# Altium PCB PCB.PcbDoc
Units mm, origin at the board's own origin, x right, y up, seen from the top; angles counter-clockwise.
Board outline 40 x 20 mm, 6 copper layers (Top Layer, Layer 1, Layer 2, Layer 3, Layer 4, Bottom Layer), stack 1.549 mm thick; 12 components, 8 nets, 42 pads, 136 vias.
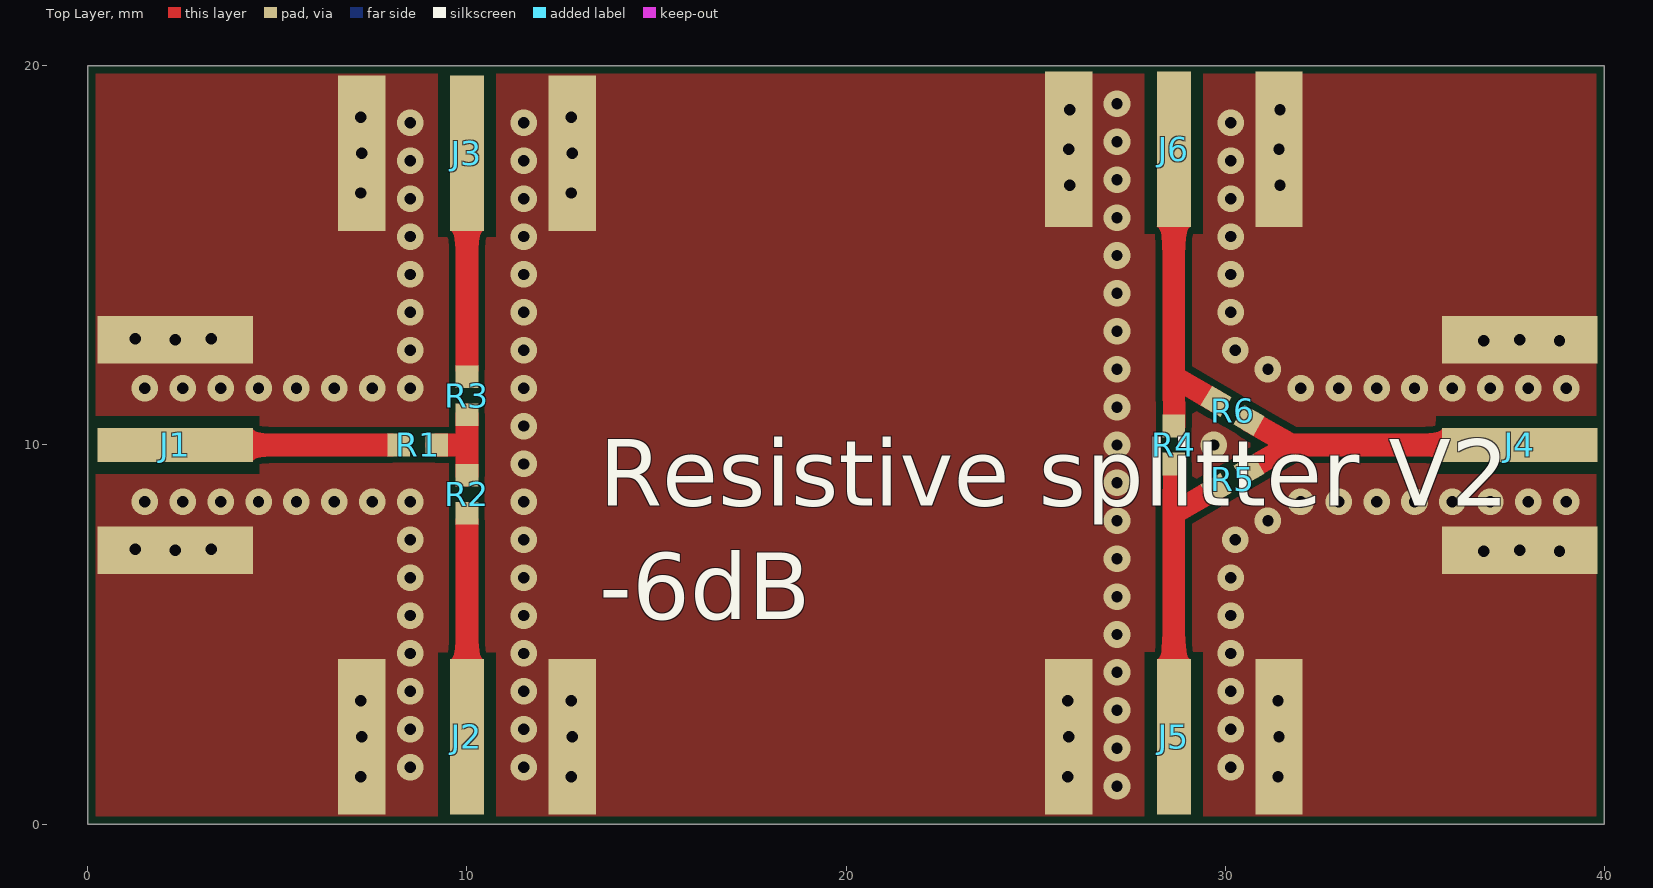
[diagram p0: Top Layer view]
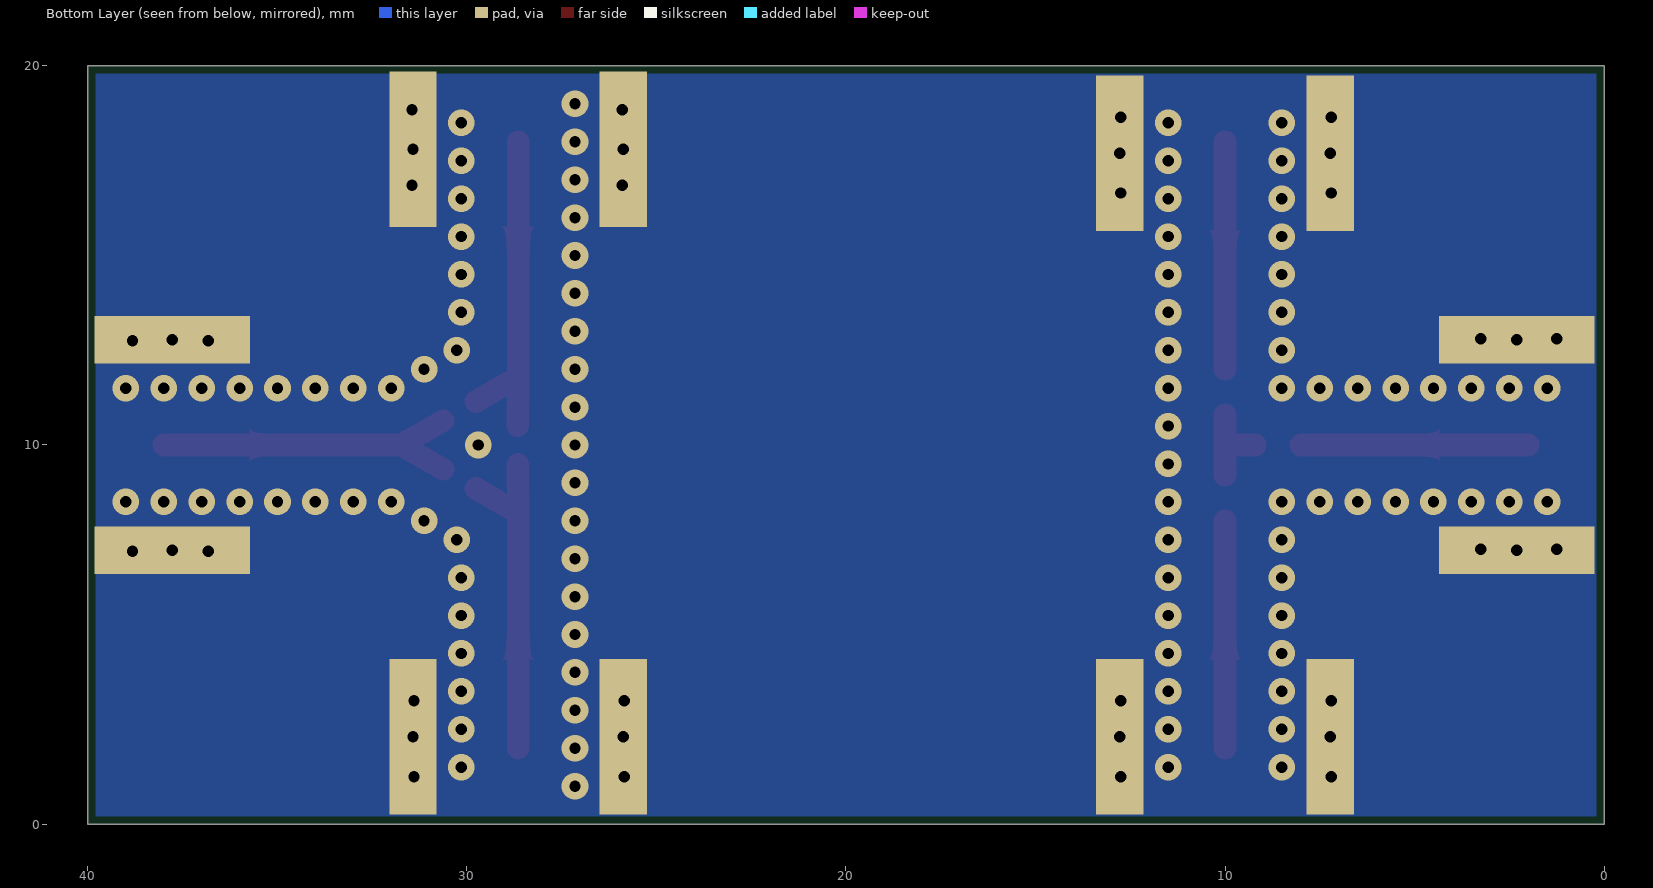
[diagram p1: Bottom Layer view, seen from below]
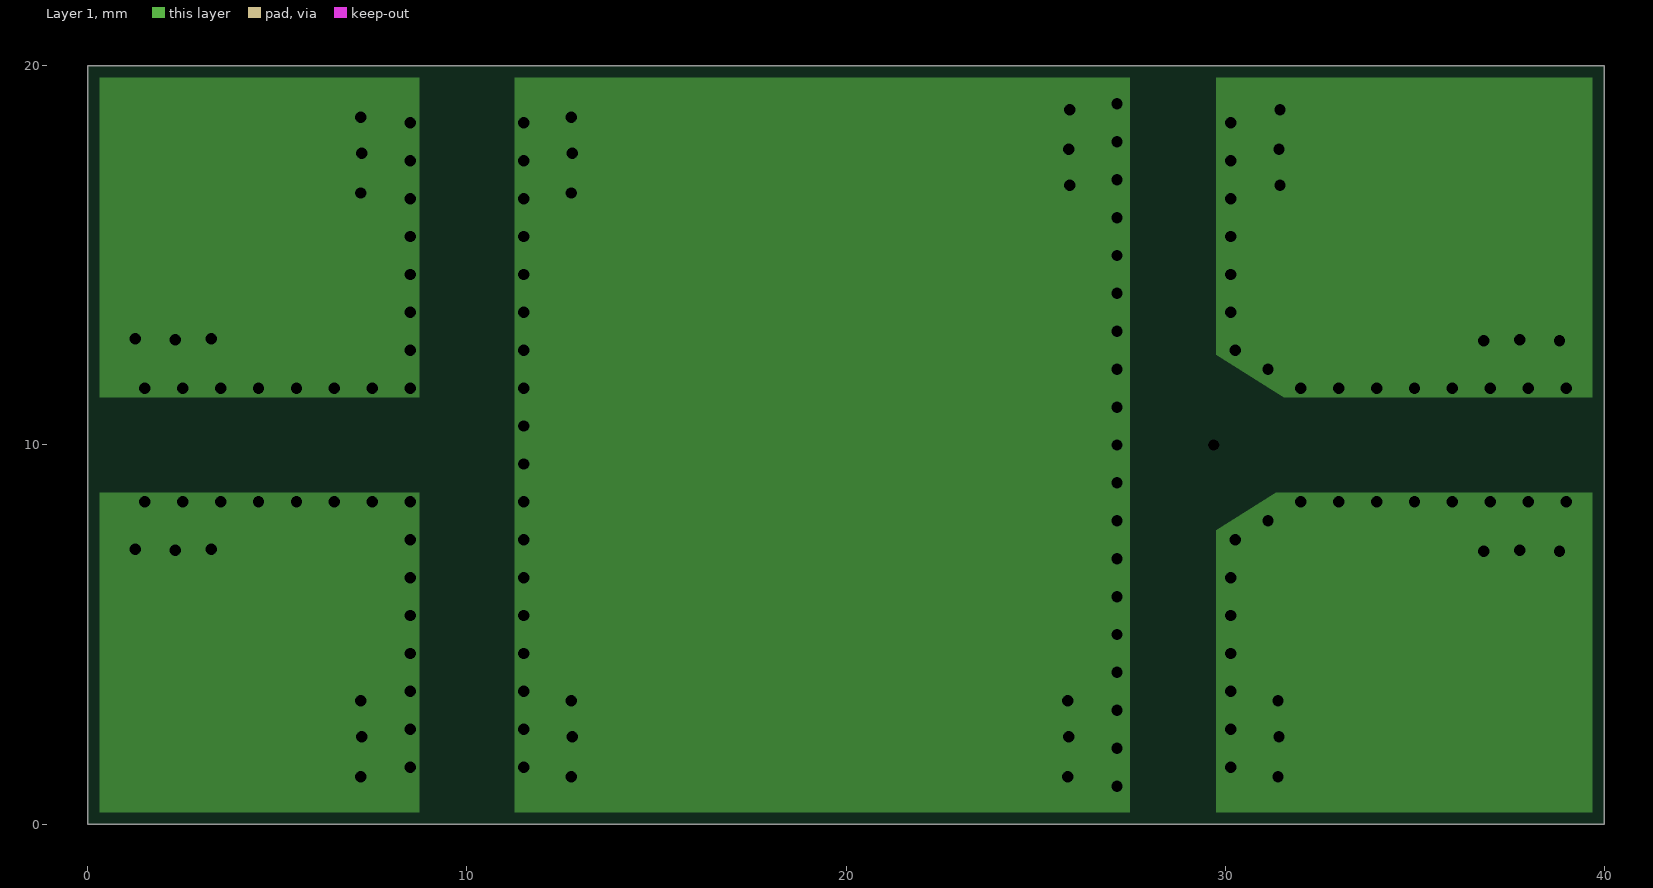
[diagram p2: Layer 1, clearances drawn from the general rule]
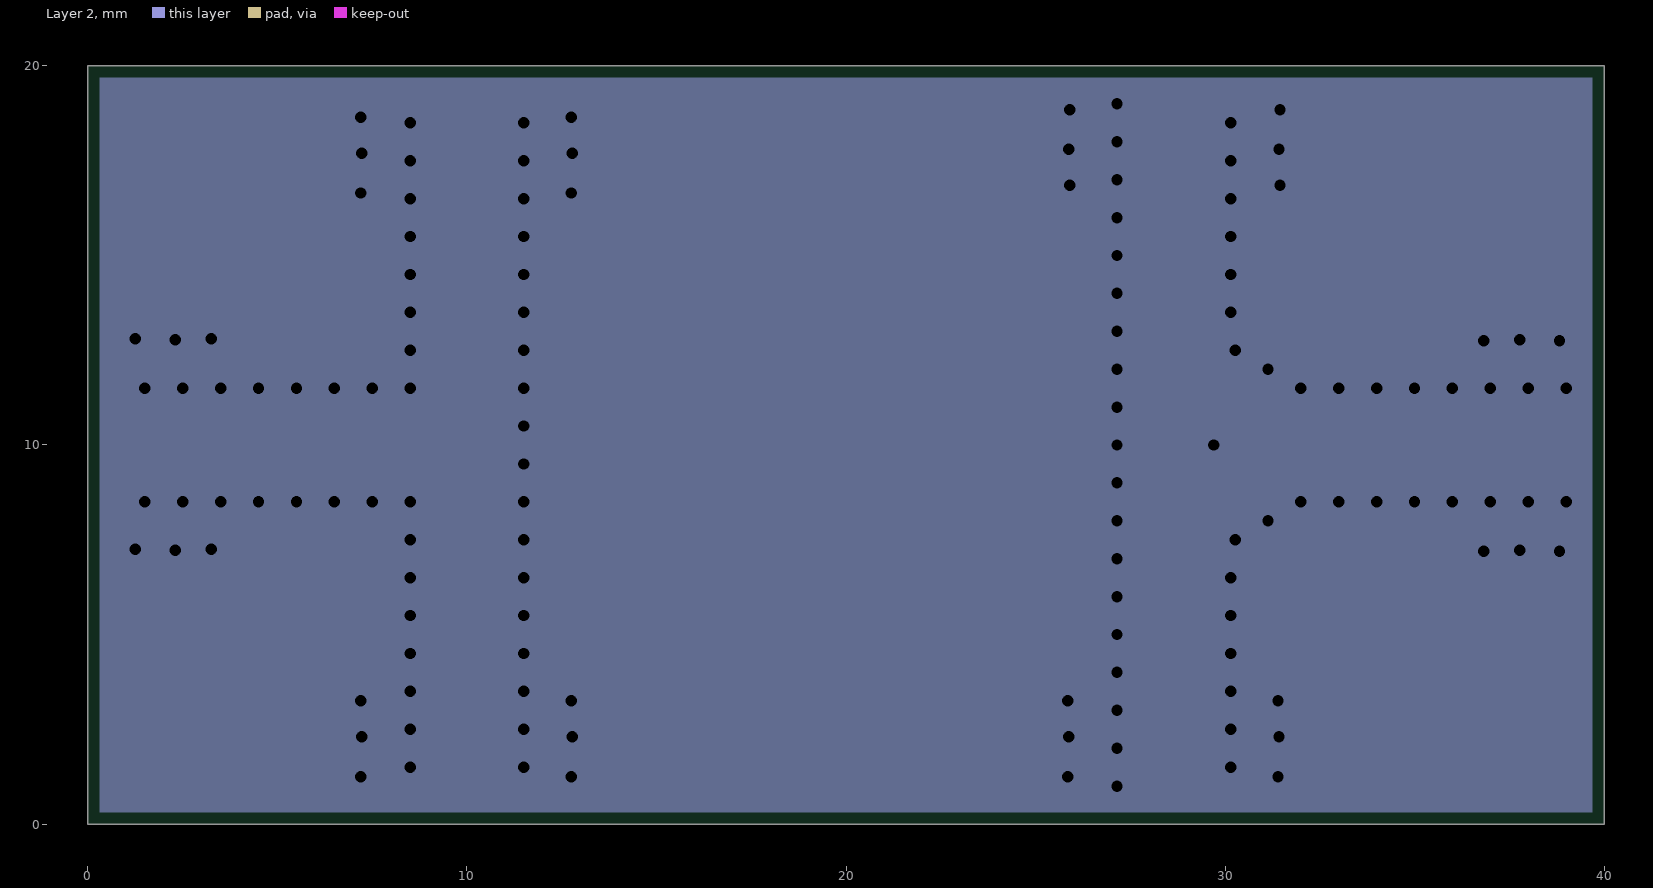
[diagram p3: Layer 2, clearances drawn from the general rule]
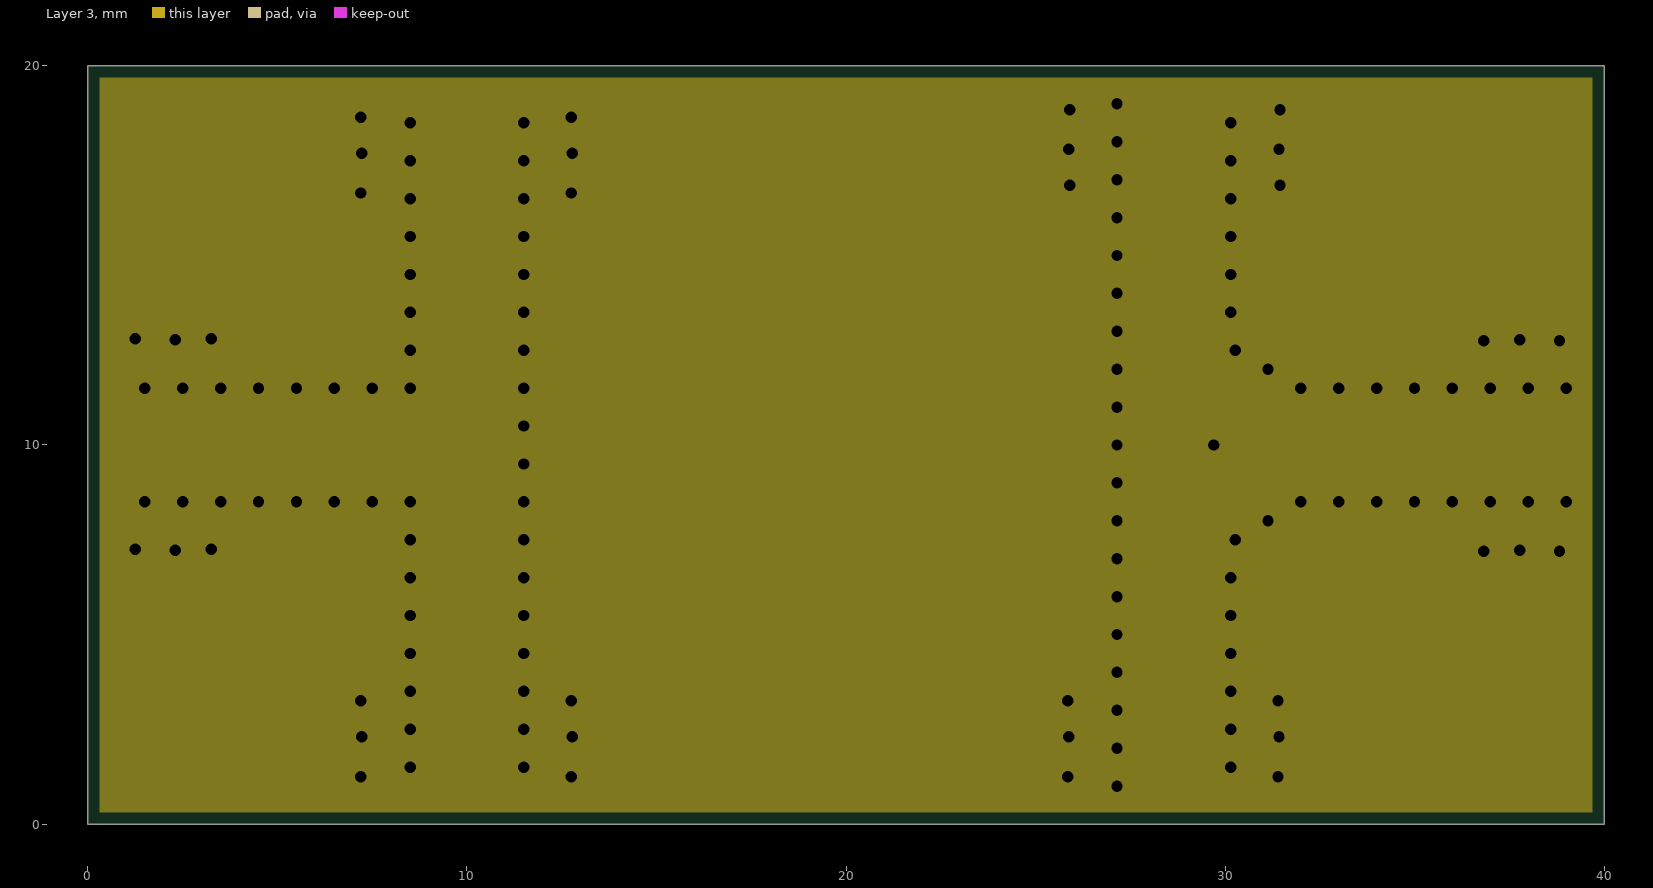
[diagram p4: Layer 3, clearances drawn from the general rule]
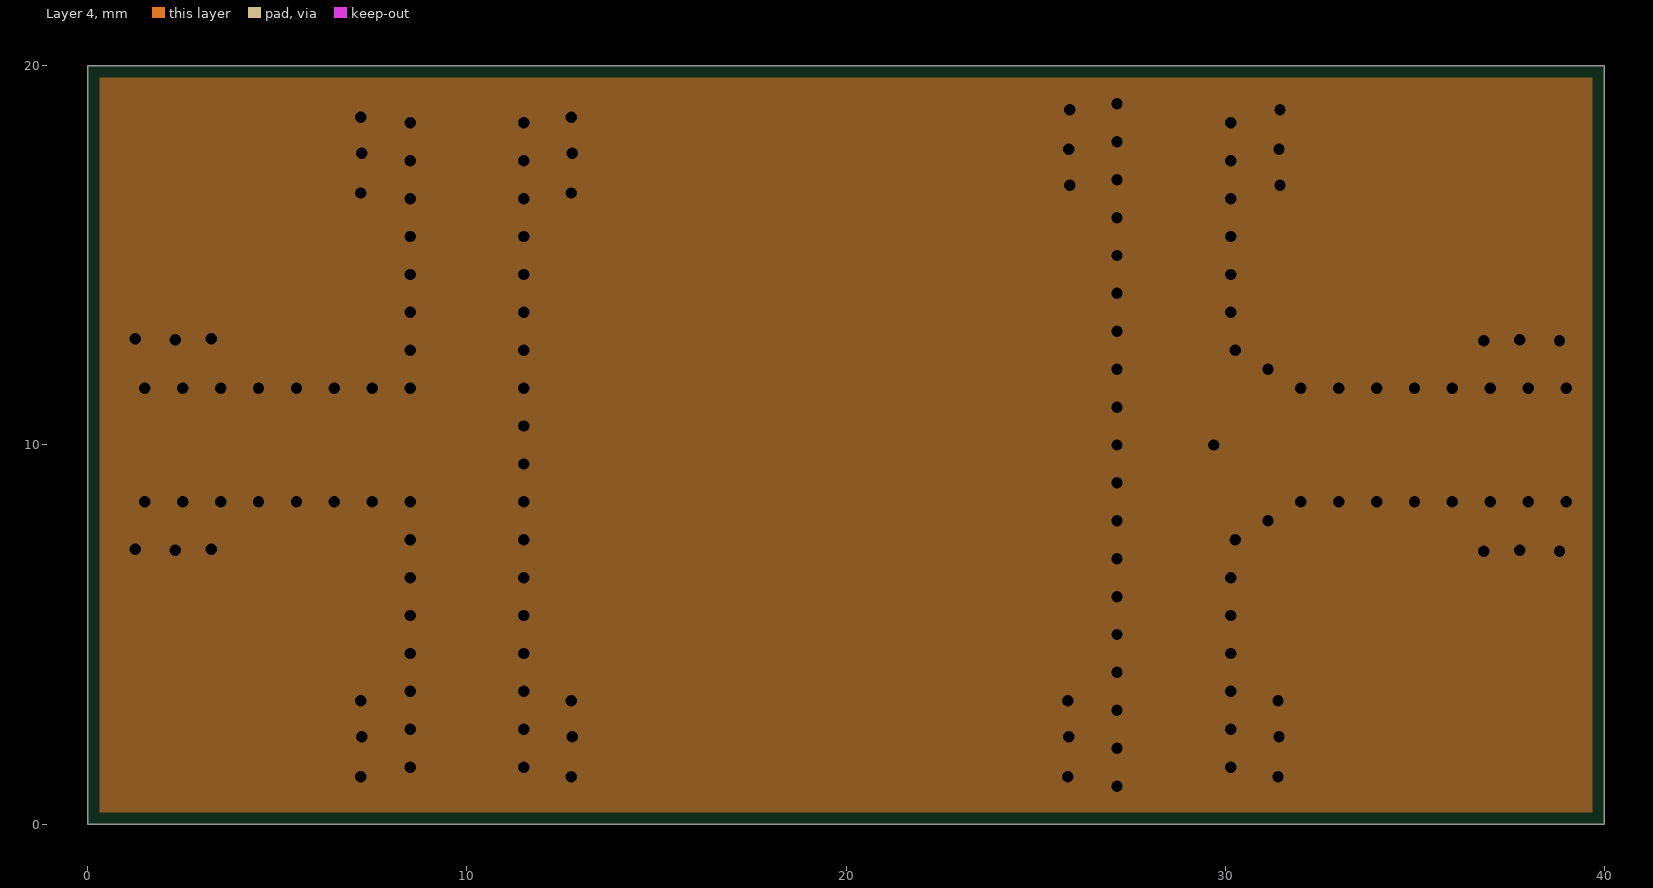
[diagram p5: Layer 4, clearances drawn from the general rule]

## Layer stack, top to bottom
Top Solder: solder mask 0.0102, Solder Resist, Dk 3.5
Top Layer: signal copper 0.0356
Dielectric 1: prepreg 0.0994, PP-015, Dk 4.1
Layer 1: plane copper 0.0175, net GND
Dielectric 2: core 0.55, Core-037, Dk 4.4
Layer 2: plane copper 0.0175, net GND
Dielectric 3: prepreg 0.1088, PP-016, Dk 4.1
Layer 3: plane copper 0.0175, net GND
Dielectric 4: core 0.55, Core-037, Dk 4.4
Layer 4: plane copper 0.0175, net GND
Dielectric 5: prepreg 0.0994, PP-015, Dk 4.1
Bottom Layer: signal copper 0.0356
Bottom Solder: solder mask 0.0102, Solder Resist, Dk 3.5

## Board outline
0,0 0,20 40,20 40,0

## Design rules (kind name [scope] priority, off if disabled: settings)
BoardOutlineClearance [All] p1: gap=0.2 ignorepadtopadclearanceinfootprint=FALSE except(0.4: Arc-SplitBarrior Arc-SplitContinuation Track-SplitBarrior Track-SplitContinuation SMDPad-SplitBarrior SMDPad-SplitContinuation THPad-SplitBarrior THPad-SplitContinuation Via-SplitBarrior Via-SplitContinuation Fill-SplitBarrior Fill-SplitContinuation Poly-SplitBarrior Poly-SplitContinuation Region-SplitBarrior Region-SplitContinuation Text-SplitBarrior Text-SplitContinuation)
Clearance "Clearance Bottom Layer" [OnLayer('Bottom Layer')] p1: gap=0.175 ignorepadtopadclearanceinfootprint=TRUE except(0.203: Arc-Hole Track-Hole SMDPad-Hole THPad-Hole Via-Hole Fill-Hole Poly-Hole Region-Hole Text-Hole; 0.254: Arc-Text Track-Text SMDPad-Text THPad-Text Via-Text Fill-Text Poly-Text Region-Text Text-Text)
Clearance "Clearance Top Layer" [OnLayer('Top Layer')] p2: gap=0.175 ignorepadtopadclearanceinfootprint=TRUE except(0.203: Arc-Hole Track-Hole SMDPad-Hole THPad-Hole Via-Hole Fill-Hole Poly-Hole Region-Hole Text-Hole; 0.254: Arc-Text Track-Text SMDPad-Text THPad-Text Via-Text Fill-Text Poly-Text Region-Text Text-Text)
Clearance [All] p3: gap=0.2 ignorepadtopadclearanceinfootprint=FALSE except(0.089: Arc-Arc Arc-Track Arc-SMDPad Track-Track Track-SMDPad SMDPad-SMDPad; 0.127: Arc-Via Track-Via SMDPad-Via THPad-Via Via-Via; 0.254: Arc-Text Track-Text SMDPad-Text THPad-Text Via-Text Fill-Text Poly-Text Region-Text Text-Text)
HoleSize [All] p1: absolutevalues=TRUE maxlimit=6.3 minlimit=0.2 maxpercent=80.000 minpercent=20.000
MinimumAnnularRing [All] p1: minimumring=0.076
MinimumSolderMaskSliver [All] p1: minsoldermaskwidth=0.1
PlaneClearance [All] p1: clearance=0.2
PlaneConnect [All] p1: planeconnectstyle=Direct reliefexpansion=0.508 reliefentries=4 reliefconductorwidth=0.254 reliefairgap=0.254
PolygonConnect PolygonConnect_1 [All] p1: thpad.connectstyle=Relief thpad.reliefconductorwidth=0.508 thpad.reliefentries=4 thpad.polygonreliefangle="90 Angle" thpad.airgapwidth=0.254 smdpad.connectstyle=Direct smdpad.reliefconductorwidth=0.508 smdpad.reliefentries=4 smdpad.polygonreliefangle="90 Angle" smdpad.airgapwidth=0.254 via.connectstyle=Direct via.reliefconductorwidth=0.508 via.reliefentries=4 via.polygonreliefangle="90 Angle" via.airgapwidth=0.254
RoutingCorners [All] p1: cornerstyle=Round minsetback=2.54 maxsetback=2.54
RoutingVias [All] p1: holewidth=0.5 width=1 viastyle="Through Hole" minholewidth=0.2 minwidth=0.45 maxholewidth=1 maxwidth=2
SilkToSilkClearance [All] p1: silktosilkclearance=0.1
SilkToSolderMaskClearance [IsPad] p1: minsilkscreentomaskgap=0.1 clearancetoexposedcopper=TRUE
SolderMaskExpansion [All] p1: expansion=0.102 istentingtop=FALSE
Width [All] p1: maxlimit=2.54 minlimit=0.089 preferedwidth=0.294 minimp=50.000000 maximp=50.000000 favimp=50.000000
23 further rules are at their usual default settings.

## Components (designator, comment, footprint, x,y, rotation, side; value= is the part's Value field where it differs from the comment)
J1 "60312202111527" 60312202111527 -5.335,10 r270 top
J2 "60312202111527" 60312202111527 10,-5.335 r0 top
J3 "60312202111527" 60312202111527 10,25.335 r180 top
J4 "60312202111527" 60312202111527 45.41,10 r90 top
J5 "60312202111527" 60312202111527 28.65,-5.335 r0 top
J6 "60312202111527" 60312202111527 28.65,25.435 r180 top
R1 "Res" RESC0402N 8.7,10 r0 top value=16.5R
R2 "Res" RESC0402N 10,8.7 r270 top value=16.5R
R3 "Res" RESC0402N 10,11.3 r90 top value=16.5R
R4 "Res" RESC0402N 28.65,10 r270 top value=49R9
R5 "Res" RESC0402N 30.2,9.1 r210 top value=49R9
R6 "Res" RESC0402N 30.2,10.9 r330 top value=49R9

## Footprints (in the part's own frame and the unit in brackets; to place one, negate y for a bottom-side part, rotate by r counter-clockwise, add the part's x,y. Pads: shape width x height; smd on the part's side, far side on the other; paste and mask are expansions set on the pad)
60312202111527 [mm] "SMA PCB End Launch  Jack"
  rect 0.9x4.1 smd: 1(0,7.635)
  rect 1.25x4.1 smd: 2(-2.775,7.635) 3(2.775,7.635)
  rect 1.25x4.1 smd far side: 4(-2.775,7.635) 5(2.775,7.635)
  body extent -3.17,-3.94 3.17,9.39, height 3.55
RESC0402N [mm] "Chip Resistor, Body 1 x0.5mm, IPC Medium Density"
  rect 0.6x0.6 smd: 1(-0.5,0) 2(0.5,0)
  body extent -0.5,-0.25 0.5,0.25, height 0.3

## Part data
J1 J2 J3 J4 J5 J6: library part CMP-03913-134708250-1, "60312202111527 WR-SMA_SMA PCB End Launch Jack", Insulation Resistance=5GΩ, Max Operating Temperature=165°C, Min Operating Temperature=-65°C, Connector Type=SMA, Impedance=50Ω, Insertion Loss (dB)=0.14dB, Insulation Material=PTFE, NexarPartId=134708250, RoHS=Compliant
R1 R2 R3: library part CRCW040216R5FKED, "RES SMD 16.5 OHM 1% 1/16W 100PPM 0402", Manufacturer=VISHAY, Supplier Part Number 1=541-16.5LCT-ND, COMPATIBLES=F1, Manufacturer P/N=CRCW040216R5FKED, NoPins=2, SCH="16.5R 0402", SMD=True, Supplier 1=Digi-Key
R4 R5 R6: library part C25120, "Chip Resistor - Surface Mount 49.9Ohms ±1% 1/16W 0402 RoHS", MANUF="Uniroyal Elec", MANUFCODE=0402WGF499JTCE, Package='0402, #JLCPCB=C25120, B/E=B

## Via types
v1: diameter 0.7, hole 0.3, Top Layer to Bottom Layer, 136 vias

## Nets (pads, with @x,y where several pads share a name; then routed paths per layer and width w, separated by ;. In a path a pad name is that pad's centre, name@x,y a point inside that pad or via, vN(x,y) a via of type N, cw(c..) or ccw(c..) an arc to the next point about the centre after c; other vN are vias at no path point)
GND: J1.2 J1.3 J1.4 J1.5 J2.2 J2.3 J2.4 J2.5 J3.2 J3.3 J3.4 J3.5 J4.2 J4.3 J4.4 J4.5 J5.2 J5.3 J5.4 J5.5 J6.2 J6.3 J6.4 J6.5
  other v1: 27.15,1 7.2,1.25 12.75,1.25 25.85,1.25 31.4,1.25 8.5,1.5 11.5,1.5 30.15,1.5 27.15,2 7.225,2.3 12.775,2.3 25.875,2.3 31.425,2.3 8.5,2.5 11.5,2.5 30.15,2.5 27.15,3 7.2,3.25 12.75,3.25 25.85,3.25 31.4,3.25 8.5,3.5 11.5,3.5 30.15,3.5 27.15,4 8.5,4.5 11.5,4.5 30.15,4.5 27.15,5 8.5,5.5 11.5,5.5 30.15,5.5 27.15,6 8.5,6.5 11.5,6.5 30.15,6.5 27.15,7 36.825,7.2 38.825,7.2 2.3,7.225 37.775,7.225 1.25,7.25 3.25,7.25 8.5,7.5 11.5,7.5 30.268,7.5 27.15,8 31.134,8 1.5,8.5 2.5,8.5 3.5,8.5 4.5,8.5 5.5,8.5 6.5,8.5 7.5,8.5 8.5,8.5 11.5,8.5 32,8.5 33,8.5 34,8.5 35,8.5 36,8.5 37,8.5 38,8.5 39,8.5 27.15,9 11.5,9.5 27.15,10 29.7,10 11.5,10.5 27.15,11 1.5,11.5 2.5,11.5 3.5,11.5 4.5,11.5 5.5,11.5 6.5,11.5 7.5,11.5 8.5,11.5 11.5,11.5 32,11.5 33,11.5 34,11.5 35,11.5 36,11.5 37,11.5 38,11.5 39,11.5 27.15,12 31.134,12 8.5,12.5 11.5,12.5 30.268,12.5 36.825,12.75 38.825,12.75 2.3,12.775 37.775,12.775 1.25,12.8 3.25,12.8 27.15,13 8.5,13.5 11.5,13.5 30.15,13.5 27.15,14 8.5,14.5 11.5,14.5 30.15,14.5 27.15,15 8.5,15.5 11.5,15.5 30.15,15.5 27.15,16 8.5,16.5 11.5,16.5 30.15,16.5 7.2,16.65 12.75,16.65 25.9,16.85 31.45,16.85 27.15,17 8.5,17.5 11.5,17.5 30.15,17.5 7.225,17.7 12.775,17.7 25.875,17.8 31.425,17.8 27.15,18 8.5,18.5 11.5,18.5 30.15,18.5 7.2,18.65 12.75,18.65 25.9,18.85 31.45,18.85 27.15,19
NetJ4_1: J4.1 R5.1 R6.2 | length 8.8
  Top Layer w0.6: R5.1@30.627,9.36 31.75,10 ; R6.2@30.627,10.64 31.75,10 ; J4.1@38,10 J4.1 31.75,10
NetJ5_1: J5.1 R4.2 R5.2 | length 8.8
  Top Layer w0.6: J5.1@28.65,2 J5.1 28.65,8.2 ; R4.2@28.658,9.492 28.65,8.2 ; R5.2@29.765,8.852 28.65,8.2
NetJ6_1: J6.1 R4.1 R6.1 | length 8.8
  Top Layer w0.6: J6.1@28.65,18 28.65,11.8 ; R4.1@28.658,10.508 28.65,11.8 ; R6.1@29.765,11.148 28.65,11.8
RF1: J1.1 R1.1 | length 6
  Top Layer w0.6: J1.1@2,10 J1.1 R1.1@8,10
RF2: R1.2 R2.1 R3.1 | length 2.4
  Top Layer w0.6: R1.2 10,10 ; R2.1 10,10 ; R3.1 10,10
RF3: J3.1 R3.2 | length 6
  Top Layer w0.6: R3.2@10,12 J3.1 J3.1@10,18
RF4: J2.1 R2.2 | length 6
  Top Layer w0.6: J2.1@10,2 J2.1 R2.2@10,8

## Polygon pours and split planes (outlines as drawn)
GND on Top Layer "NONET_L-01_P-001" (solid, pour order 0): 0,0 0,20 40,20 40,0
GND on Bottom Layer "NONET_L-01_P-001" (solid, pour order 1): 0,20 40,20 40,0 0,0
GND on Layer 2 (split plane): 39.699,0.301 0.301,0.301 0.301,19.699 39.699,19.699
GND on Layer 4 (split plane): 39.699,0.301 0.301,0.301 0.301,19.699 39.699,19.699
GND on Layer 1 (split plane): 39.699,0.301 29.75,0.301 29.75,7.75 31.35,8.75 39.699,8.75
GND on Layer 1 (split plane): 39.699,11.25 31.55,11.25 29.75,12.375 29.75,19.699 39.699,19.699
GND on Layer 1 (split plane): 27.5,0.301 11.25,0.301 11.25,8.75 11.25,11.25 11.25,19.699 27.5,19.699
GND on Layer 1 (split plane): 8.75,11.25 0.301,11.25 0.301,19.699 8.75,19.699
GND on Layer 1 (split plane): 8.75,0.301 0.301,0.301 0.301,8.75 8.75,8.75
GND on Layer 3 (split plane): 39.699,0.301 0.301,0.301 0.301,19.699 39.699,19.699

## Other copper
Top Layer:
  pour cut-out: 35.555,9.225 35.555,10.775 39.975,10.775 39.975,9.225
  pour cut-out: 27.875,4.55 29.425,4.55 29.425,0 27.875,0
  pour cut-out: 29.425,15.566 27.875,15.566 27.875,20 29.425,20
  pour cut-out: 10.775,15.475 9.225,15.475 9.225,20 10.775,20
  pour cut-out: 9.225,4.532 10.775,4.532 10.775,0 9.225,0
  pour cut-out: 4.53,10.775 4.53,9.225 0,9.225 0,10.775
Layer 1 (plane layer: these items are gaps in the copper):
  rectangle: 28,8.75 40,11.25
  rectangle: 27.5,0 29.75,20
  rectangle: 0,8.75 11.25,11.25
  rectangle: 8.75,0 11.25,20
  region: 31.75,11.125 29.75,12.375 29.75,7.75 31.75,9

## Silkscreen, mask and mechanical layers (free items; w line width, h text height)
Top Overlay:
  text "Resistive splitter V2 / -6dB" at 13.489,4.816 h3
Top Solder:
  rectangle: 27.15,-0.052 30.25,20
  rectangle: 29.5,8.5 40,11.5
  rectangle: 0,8.5 10,11.5
  rectangle: 8.5,0 11.5,19.75
  region: 30,12.5 32,11.5 32,8.5 30,7.5 28,7.5 28,12.5
Mechanical 1:
  the board outline again, w0.2

## Text inside footprints (layer, text, board x,y; h text height)
J1: Mechanical 2 "PCB END" at -1,12.2 h0.76 r270
J2: Mechanical 2 "PCB END" at 7.8,-1 h0.76
J3: Mechanical 2 "PCB END" at 12.2,21 h0.76 r180
J4: Mechanical 2 "PCB END" at 41.075,7.8 h0.76 r90
J5: Mechanical 2 "PCB END" at 26.45,-1 h0.76
J6: Mechanical 2 "PCB END" at 30.85,21.1 h0.76 r180